# EAGLE board new_inverter (EAGLE 9.4.0)
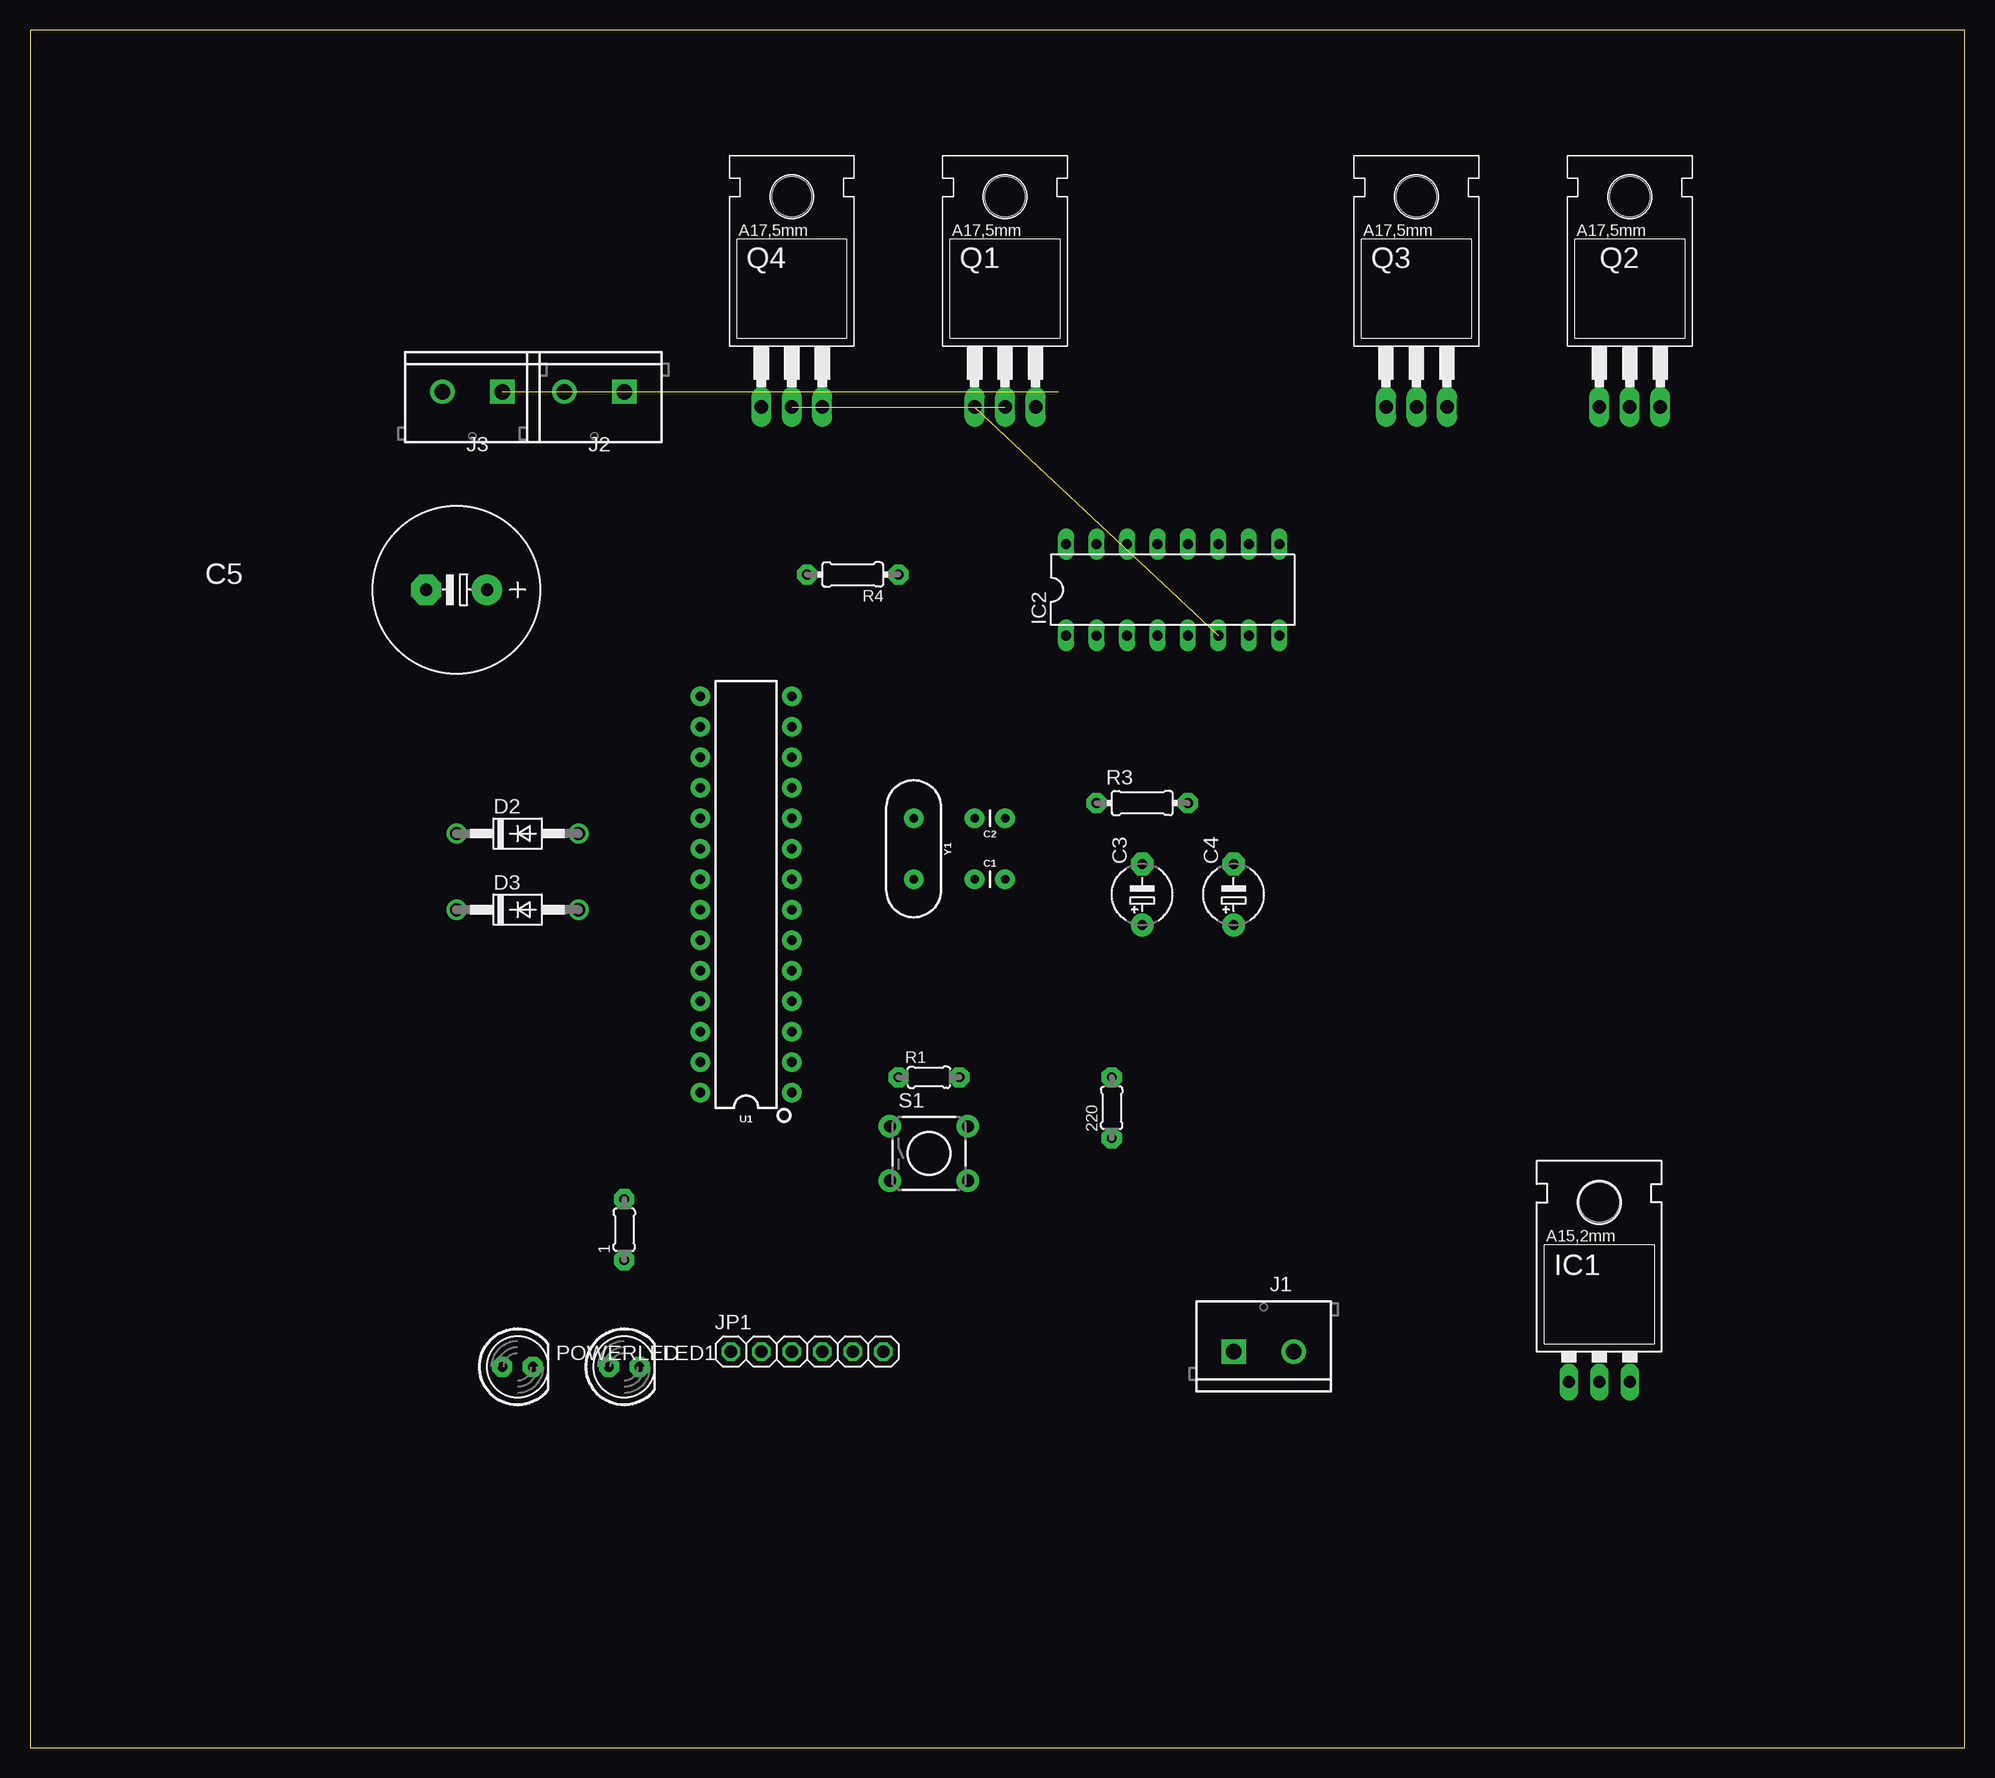
[diagram p0: board, top side]
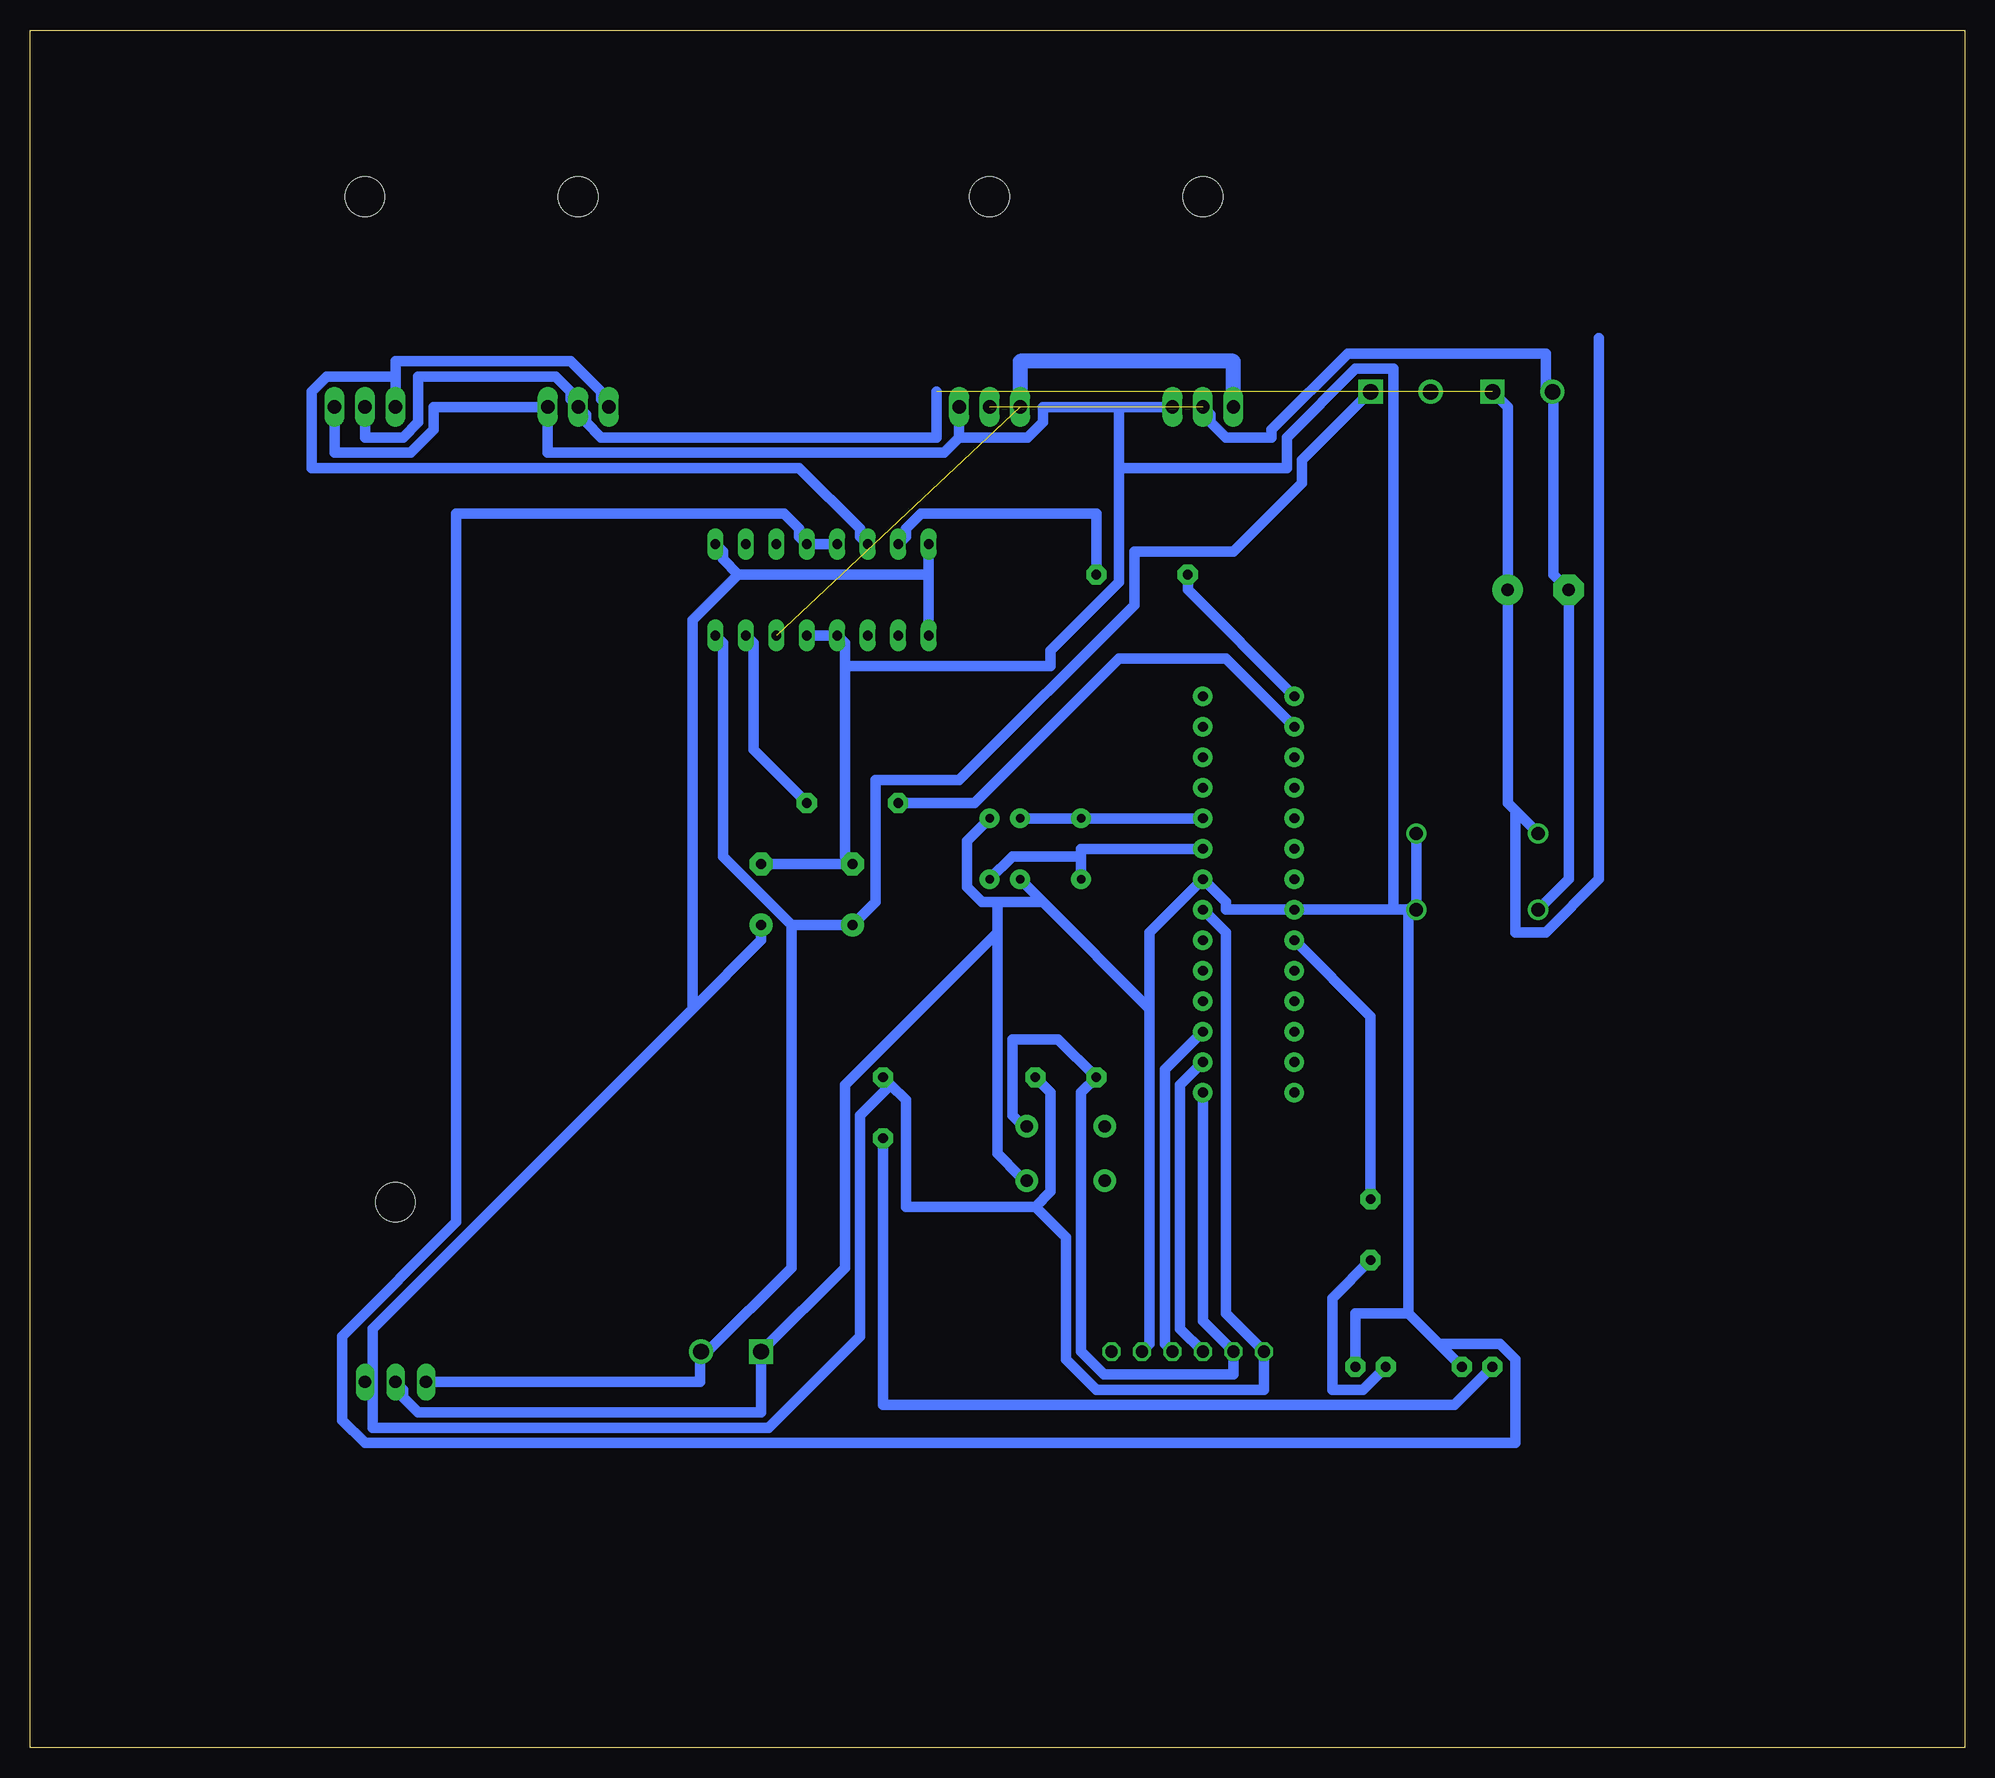
[diagram p1: board, bottom side, seen from below]

Size 161.27 x 143.18 mm. Coordinates in mm from the lower left corner, seen from the top.
Outline: 0,0 161.27,0 161.27,143.18 0,143.18 0,0
Copper layers (1*16): Top 0.035mm / dielectric 1.5mm / Bottom 0.035mm
Design rules "default *": minimum track width 35mil, minimum drill 0.35mm, track to track 10mil, track to pad 10mil, pad to pad 6mil, via to via 6mil, smd to smd 6mil, copper to edge 50mil, drill to drill 10mil, minimum pad ring 10mil, minimum via ring 8mil, stop-mask expansion 4mil, vias tented up to drill 0mil, thermal gap 10mil

## Footprints (pad centres in the part's own frame; a part is rotated, then mirrored left to right if it is on the bottom)
0204/5 = drill 0.813 pad 1.676 octagon: 1 -2.54,0; 2 2.54,0
CAP-PTH-2.54 = drill 0.7 pad 1.651: 1 -1.27,0; 2 1.27,0
E5-5 = drill 0.813 pad 1.905: + -2.54,0 | drill 0.813 pad 1.905 octagon: - 2.54,0
E5-13 = drill 1.016 pad 2.54: + -2.54,0 | drill 1.016 pad 2.54 octagon: - 2.54,0
DO41-10 = drill 1.118: A 5.08,0; C -5.08,0
78XXL = drill 1.016 long: GND 0,-3.81; IN -2.54,-3.81; OUT 2.54,-3.81 | hole 3.302: 0,11.176
DIL16 = drill 0.813 long: 1 -8.89,-3.81; 2 -6.35,-3.81; 3 -3.81,-3.81; 4 -1.27,-3.81; 5 1.27,-3.81; 6 3.81,-3.81; 7 6.35,-3.81; 8 8.89,-3.81; 9 8.89,3.81; 10 6.35,3.81; 11 3.81,3.81; 12 1.27,3.81; 13 -1.27,3.81; 14 -3.81,3.81; 15 -6.35,3.81; 16 -8.89,3.81
SCREWTERMINAL-5MM-2 = drill 1.3 pad 2.032 square: 1 0,0 | drill 1.3 pad 2.032: 2 5,0
1X06 = drill 1.016 octagon: 1 -6.35,0; 2 -3.81,0; 3 -1.27,0; 4 1.27,0; 5 3.81,0; 6 6.35,0
LED5MM = drill 0.813 pad 1.676 octagon: A -1.27,0; K 1.27,0
TO220 = drill 1.118 long: 1 -2.54,-6.35; 2 0,-6.35; 3 2.54,-6.35 | hole 3.302: 0,11.176
0204/7 = drill 0.813 pad 1.676 octagon: 1 -3.81,0; 2 3.81,0
TACTILE-PTH = drill 1.016 pad 1.88: 1 -3.251,2.261; 2 3.251,2.261; 3 -3.251,-2.261; 4 3.251,-2.261
DIP28 = drill 0.813 pad 1.626: 1 -16.51,-3.81; 2 -13.97,-3.81; 3 -11.43,-3.81; 4 -8.89,-3.81; 5 -6.35,-3.81; 6 -3.81,-3.81; 7 -1.27,-3.81; 8 1.27,-3.81; 9 3.81,-3.81; 10 6.35,-3.81; 11 8.89,-3.81; 12 11.43,-3.81; 13 13.97,-3.81; 14 16.51,-3.81; 15 16.51,3.81; 16 13.97,3.81; 17 11.43,3.81; 18 8.89,3.81; 19 6.35,3.81; 20 3.81,3.81; 21 1.27,3.81; 22 -1.27,3.81; 23 -3.81,3.81; 24 -6.35,3.81; 25 -8.89,3.81; 26 -11.43,3.81; 27 -13.97,3.81; 28 -16.51,3.81
HC49US = drill 0.7 pad 1.651: 1 -2.54,0; 2 2.54,0

## Placement (x,y rotation side)
1  220  [0204/5]  49.53,43.18 90 top
220  [0204/5]  90.17,53.34 90 top
C1  22pF  [CAP-PTH-2.54]  80.01,72.39 0 top
C2  22pF  [CAP-PTH-2.54]  80.01,77.47 180 top
C3  100uf  [E5-5]  92.71,71.12 90 top
C4  .1uf  [E5-5]  100.33,71.12 90 top
C5  [E5-13]  35.56,96.52 180 top
D2  1N4004  [DO41-10]  40.64,76.2 0 top
D3  1N4004  [DO41-10]  40.64,69.85 0 top
IC1  [78XXL]  130.81,34.29 0 top
IC2  L293D  [DIL16]  95.25,96.52 0 top
J1  [SCREWTERMINAL-5MM-2]  100.33,33.02 0 top
J2  [SCREWTERMINAL-5MM-2]  49.53,113.03 180 top
J3  [SCREWTERMINAL-5MM-2]  39.37,113.03 180 top
JP1  [1X06]  64.77,33.02 0 top
LED1  [LED5MM]  49.53,31.75 0 top
POWERLED  [LED5MM]  40.64,31.75 0 top
Q1  IRF840  [TO220]  81.28,118.11 0 top
Q2  IRF840  [TO220]  133.35,118.11 0 top
Q3  IRF840  [TO220]  115.57,118.11 0 top
Q4  IRF840  [TO220]  63.5,118.11 0 top
R1  1k  [0204/5]  74.93,55.88 0 top
R3  [0204/7]  92.71,78.74 0 top
R4  [0204/7]  68.58,97.79 180 top
S1  [TACTILE-PTH]  74.93,49.53 0 top
U1  328P  [DIP28]  59.69,71.12 90 top
Y1  16MHz  [HC49US]  73.66,74.93 270 top

## Library data of the parts
1 220 C3-C5 JP1 LED1 POWERLED R1 R3 R4 = adafruit
C1 C2 = SparkFun-Capacitors; PROD_ID: CAP-09128
D2 D3 = diode
IC1 = tango
IC2 = st-microelectronics; MPN: L293D; OC_FARNELL: 9589619; OC_NEWARK: 56P8249
J1-J3 = SparkFun-Connectors; SF_SKU: PRT-08432
Q1-Q4 = transistor-fet
S1 = SparkFun-Retired
U1 = SparkFun-IC-Microcontroller; PROD_ID: IC-09136
Y1 = SparkFun-Clocks; PROD_ID: XTAL-08181; SF_ID: COM-00536

## Nets
5V: 220.2 C4.+ IC1.OUT IC2.1 IC2.9 IC2.16 JP1.1 R1.2 U1.7
12V: C3.+ IC1.IN IC2.8 J1.2 J2.1
AC1: C5.+ D2.C J3.1 Q2.2 Q3.2
AC2: C5.- D3.C J3.2 Q1.2 Q4.2
GND: C1.1 C2.1 C3.- C4.- D2.A D3.A IC1.GND IC2.4 IC2.5 IC2.12 IC2.13 J1.1 JP1.5 LED1.K POWERLED.K Q1.3 Q2.3 Q3.3 Q4.3 S1.4 U1.8 U1.22
LED1: 1.2 U1.23
MOSFET1: R4.2 U1.15
MOSFET2: R3.1 U1.16
N$1: 220.1 POWERLED.A
N$2: C1.2 U1.9 Y1.2
N$3: C2.2 U1.10 Y1.1
N$4: IC2.14 Q2.1 Q3.1
N$5: IC2.6 Q1.1 Q4.1
N$7: IC2.7 R3.2
N$8: 1.1 LED1.A
N$9: IC2.15 R4.1
RESET: JP1.2 R1.1 S1.2 U1.1
RX: JP1.3 U1.2
TX: JP1.4 U1.3

## Tracks (layer width: path | path; a pad name or v marks a point on that pad's centre or on a via)
5V
  Bottom 0.889: R1.2 76.2,54.61 76.2,46.36 77.47,45.09 | 77.47,45.09 88.27,45.09 88.27,53.98 89.53,55.24 | 220.2 89.53,55.24 | U1.7 61.59,67.94 61.59,36.2 JP1.1 58.42,29.84 72.39,29.84 74.93,32.38 74.93,42.55 77.47,45.09 | IC2.16 86.36,97.79 | 86.36,97.79 IC2.1 | IC2.9 103.5,99.69 103.5,99.06 102.23,97.79 | 86.36,97.79 102.23,97.79 | 132.72,31.12 132.72,34.92 106.04,61.59 | 106.04,61.59 100.33,67.31 C4.+ | 102.23,97.79 106.04,93.98 106.04,61.59 | 89.53,55.24 92.07,52.7 92.07,34.29 99.69,26.67 132.72,26.67 132.72,31.12 | 132.72,31.12 IC1.OUT
12V
  Bottom 0.889: IC1.IN 105.41,30.48 105.41,33.02 J1.2 104.78,33.02 97.79,40 97.79,68.58 | IC2.8 103.5,92.07 103.5,74.3 97.79,68.58 | 97.79,68.58 C3.+ 90.81,70.48 90.81,80.65 83.82,80.65 69.22,95.25 69.22,99.69 60.96,99.69 55.24,105.41 55.24,107.31 J2.1
AC1  (1 unrouted)
  Bottom 0.889: Q2.2 133.35,109.22 130.18,109.22 128.91,110.49 128.91,114.3 117.47,114.3 116.21,113.03 116.21,112.4 Q3.2 114.94,111.12 114.94,110.49 113.66,109.22 85.72,109.22 85.72,113.03 | 37.46,78.1 38.1,78.74 C5.+ 38.1,111.76 J3.1 | 37.46,78.1 D2.C | 30.48,117.47 30.48,72.39 34.92,67.94 37.46,67.94 37.46,78.1
AC2  (1 unrouted)
  Bottom 0.889: D3.C 33.02,72.39 C5.- 34.29,97.79 34.29,113.03 J3.2 34.92,113.03 34.92,116.21 51.44,116.21 57.78,109.85 57.78,109.22 61.59,109.22 62.87,110.49 62.87,111.12 Q4.2
GND
  Bottom 0.889: IC2.13 IC2.12 97.16,100.97 97.16,101.6 98.43,102.87 125.73,102.87 125.73,43.81 135.25,34.29 135.25,27.3 133.35,25.4 37.46,25.4 37.46,32.38 38.73,33.66 43.81,33.66 | 46.35,36.2 43.81,33.66 | 43.81,33.66 POWERLED.K | 46.35,36.2 50.8,36.2 LED1.K | IC2.5 IC2.4 93.34,92.07 93.34,90.17 | 93.34,90.17 93.34,74.3 C3.- C4.- | 70.48,111.76 76.84,111.76 76.84,110.49 78.1,109.22 83.82,109.22 | 70.48,111.76 Q4.3 | Q1.3 83.82,109.22 | Q2.3 135.89,107.95 129.54,107.95 127.63,109.85 127.63,111.76 Q3.3 118.11,107.95 85.09,107.95 83.82,109.22 | 93.34,90.17 76.2,90.17 76.2,91.44 70.48,97.16 70.48,106.68 | 70.48,111.76 70.48,106.68 | IC1.GND 130.18,29.84 130.18,29.21 128.91,27.94 100.33,27.94 J1.1 93.34,40 93.34,55.24 80.64,67.94 | 46.35,69.85 47.62,69.85 | 47.62,69.85 U1.22 61.59,69.85 61.59,70.48 U1.8 67.94,67.94 67.94,61.59 | D2.A D3.A 46.35,69.85 | JP1.5 67.94,33.66 67.94,61.59 | 67.94,61.59 76.84,70.48 | 76.84,70.48 C1.1 | C2.1 83.19,75.56 83.19,71.75 81.91,70.48 80.64,70.48 | 76.84,70.48 80.64,70.48 | 80.64,70.48 80.64,67.94 | 80.64,67.94 80.64,49.53 78.74,47.62 S1.4 | 70.48,106.68 56.52,106.68 56.52,109.22 50.8,114.94 47.62,114.94 47.62,69.85 | 46.35,69.85 46.35,36.2
LED1
  Bottom 0.889: U1.23 49.53,60.96 1.2
MOSFET1
  Bottom 0.889: U1.15 64.77,96.52 R4.2
MOSFET2
  Bottom 0.889: U1.16 61.59,90.81 70.48,90.81 82.55,78.74 R3.1
N$1
  Bottom 0.889: POWERLED.A 42.55,28.58 90.17,28.58 220.1
N$2
  Bottom 0.889: U1.9 73.66,74.93 73.66,74.3 | Y1.2 73.66,74.3 | C1.2 79.38,74.3 73.66,74.3
N$3
  Bottom 0.889: U1.10 Y1.1 C2.2
N$4
  Bottom 0.889: IC2.14 92.07,100.97 92.07,101.6 97.16,106.68 137.79,106.68 137.79,113.03 136.53,114.3 130.81,114.3 | Q2.1 130.81,114.3 | Q3.1 113.66,112.4 113.66,113.03 116.21,115.57 130.81,115.57 130.81,114.3
N$5  (1 unrouted)
  Bottom 1.27: Q4.1 60.96,115.57 78.74,115.57 Q1.1
N$7
  Bottom 0.889: IC2.7 100.97,92.07 100.97,83.19 R3.2
N$8
  Bottom 0.889: LED1.A 50.16,29.84 52.7,29.84 52.7,37.47 1.1
N$9
  Bottom 0.889: IC2.15 88.27,100.97 88.27,101.6 87,102.87 72.39,102.87 R4.1
RESET
  Bottom 0.889: S1.2 78.74,52.07 79.38,52.7 79.38,59.05 75.56,59.05 R1.1 73.66,54.61 73.66,33.02 71.75,31.12 60.96,31.12 JP1.2 63.5,35.56 U1.1
RX
  Bottom 0.889: JP1.3 65.41,34.92 65.41,55.24 U1.2
TX
  Bottom 0.889: JP1.4 66.67,33.66 66.67,56.52 U1.3